# Altium PCB PCB1.PcbDoc
Units mm, origin at the board's own origin, x right, y up, seen from the top; angles counter-clockwise.
Board outline 39.4 x 33.3 mm, 2 copper layers (Top Layer, Bottom Layer); 22 components, 18 nets, 98 pads, 13 vias.
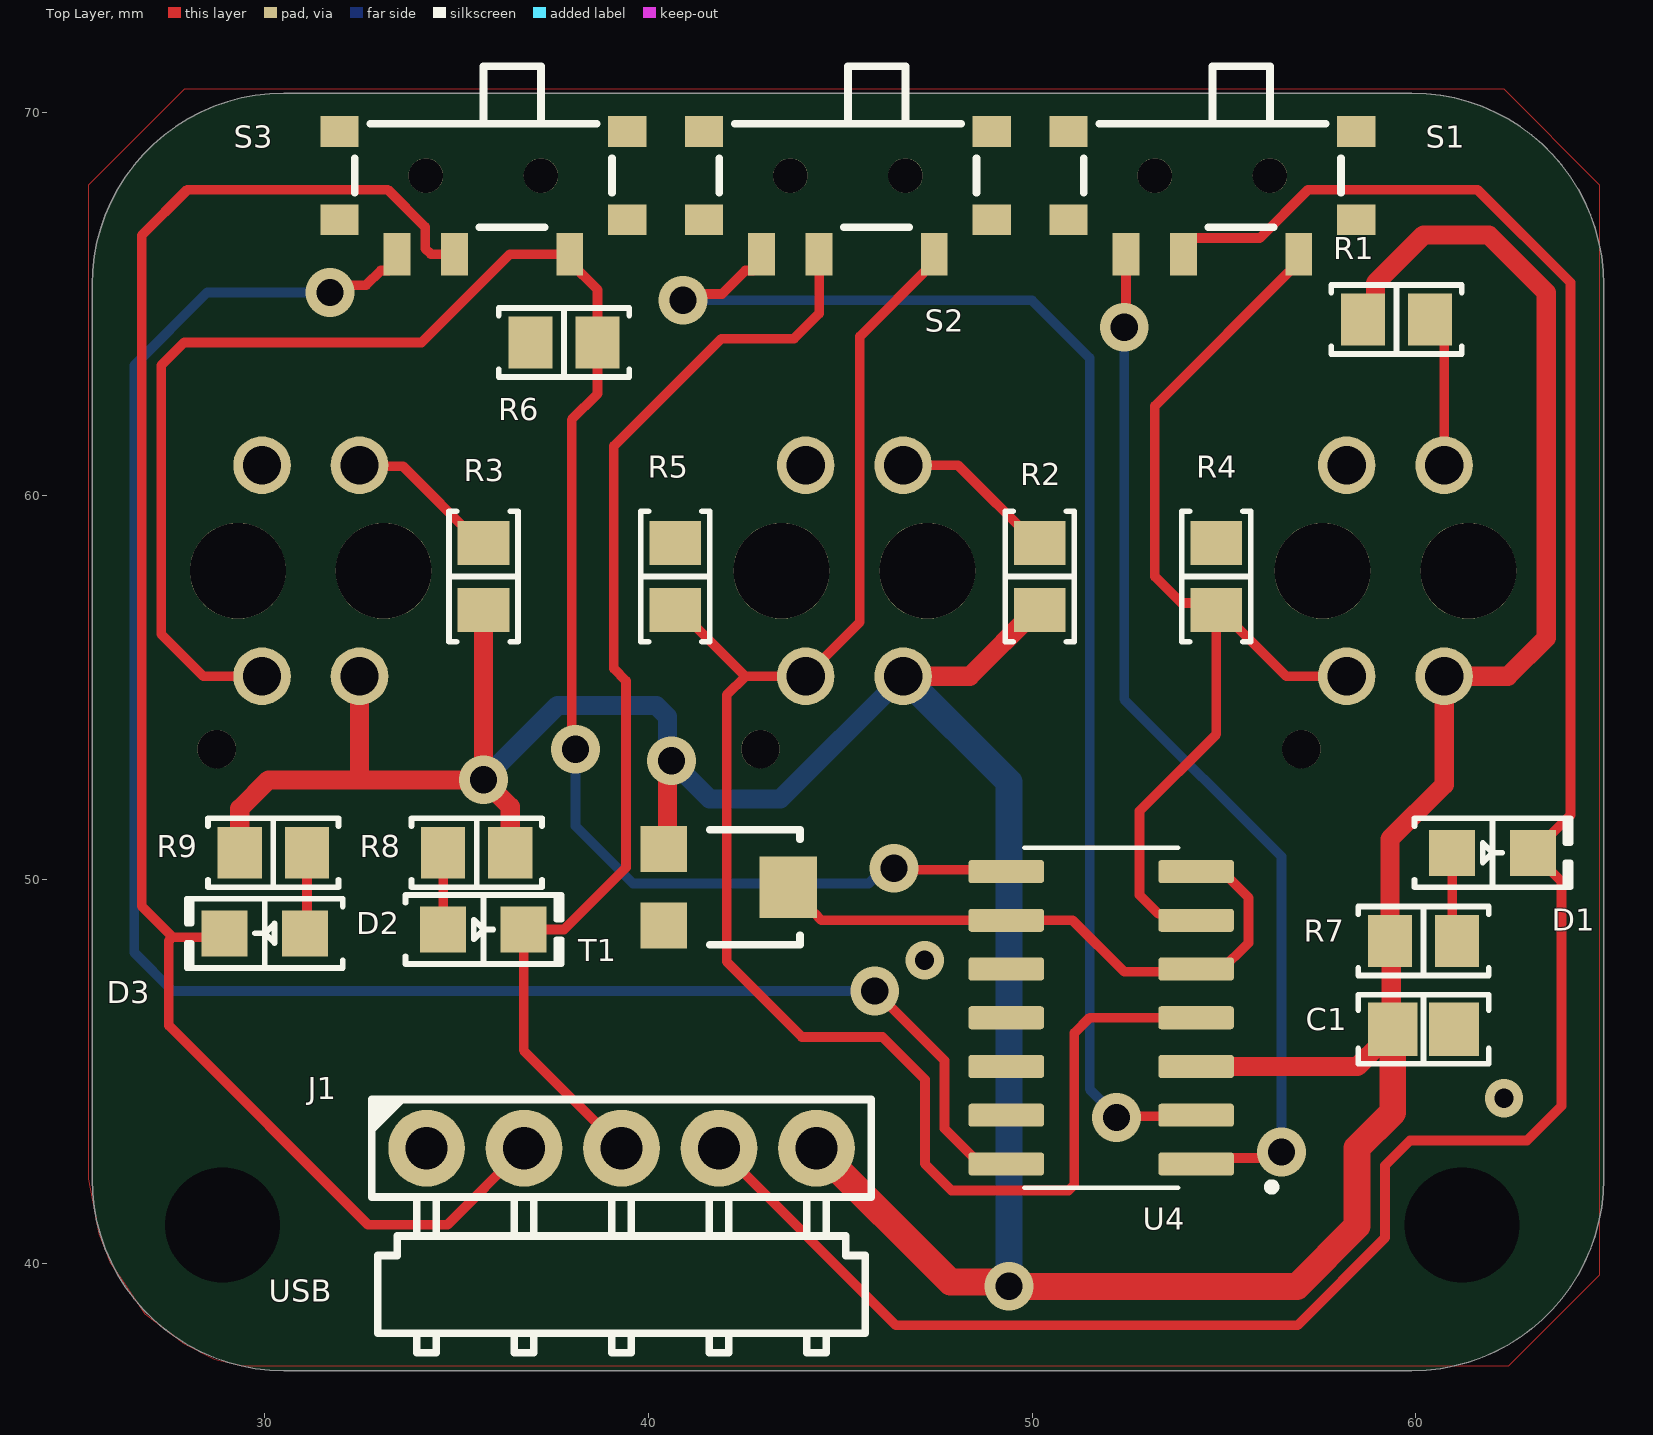
[diagram p0: Top Layer view]
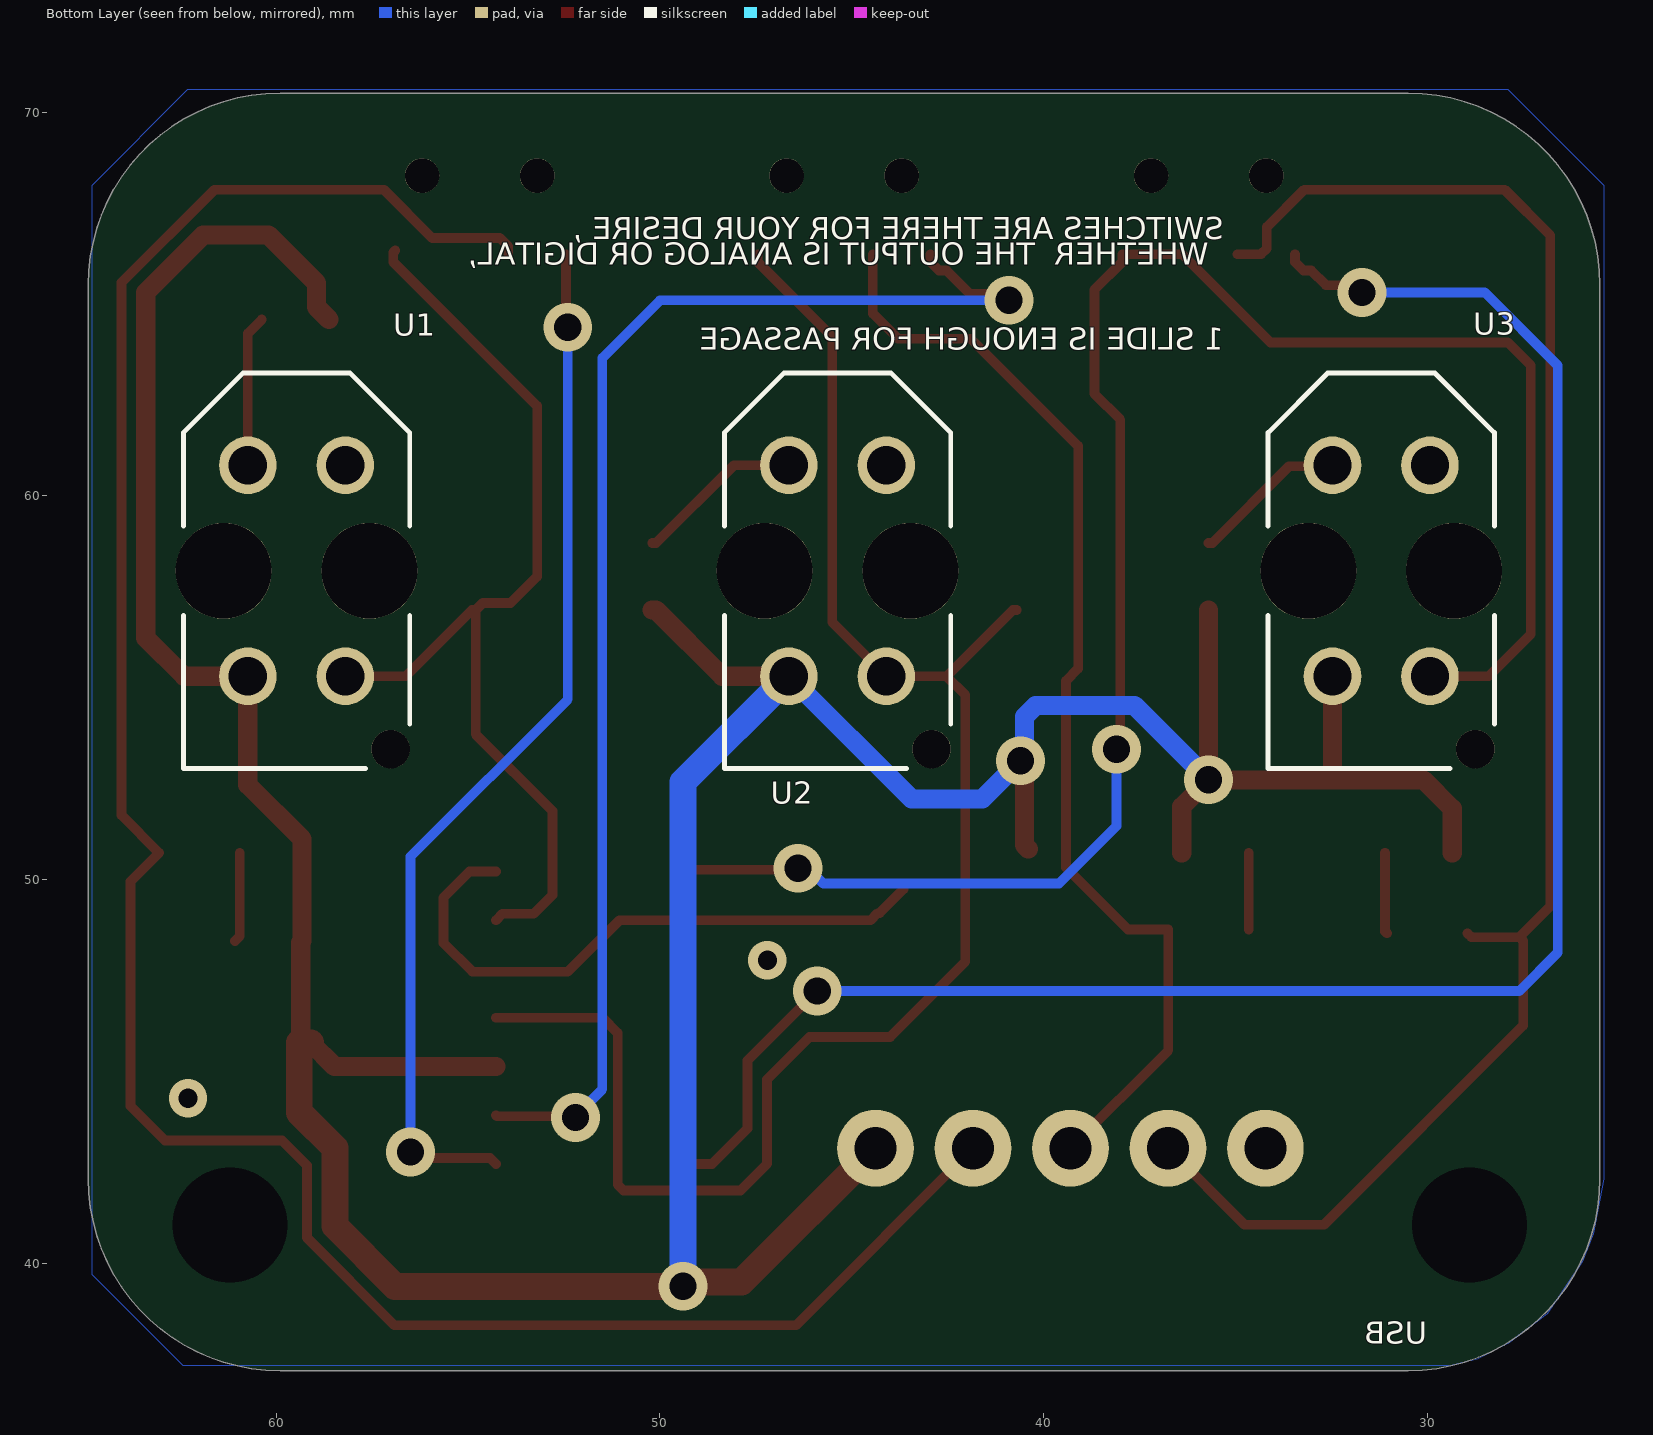
[diagram p1: Bottom Layer view, seen from below]
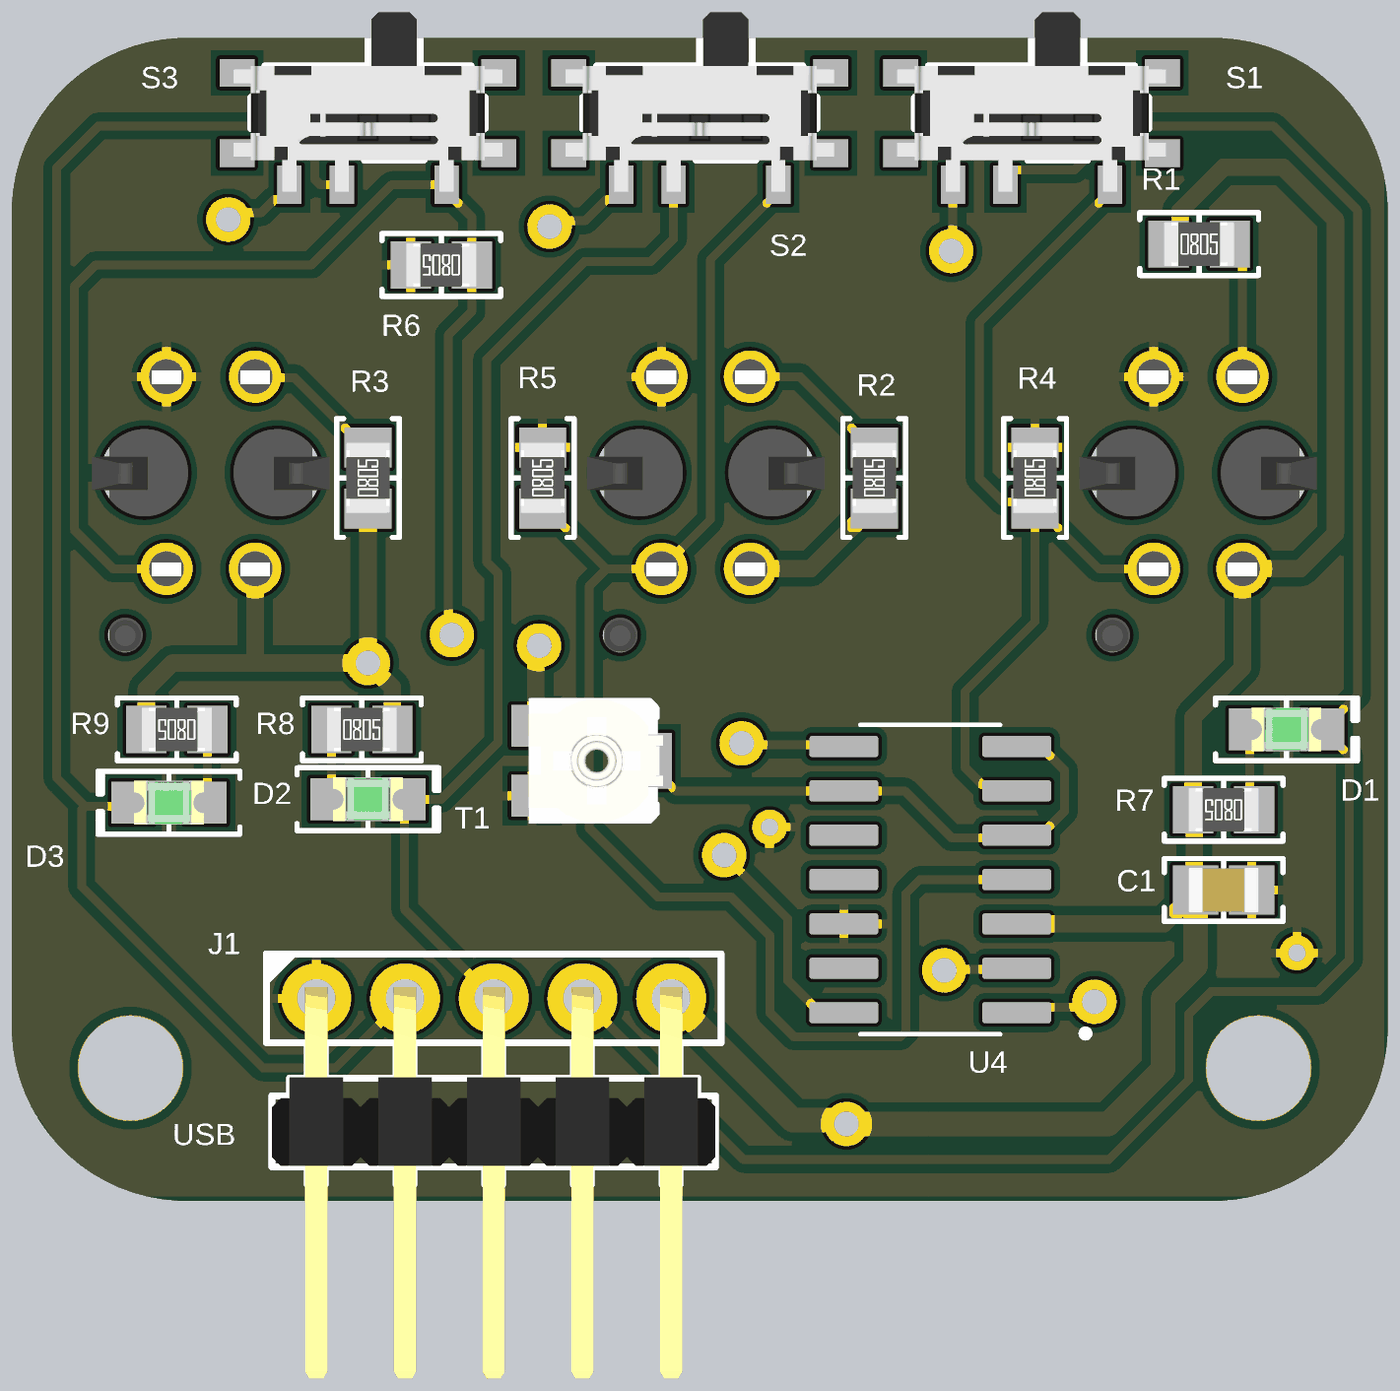
[diagram p2: 3D render of the assembled board from above, using the file's embedded part models]
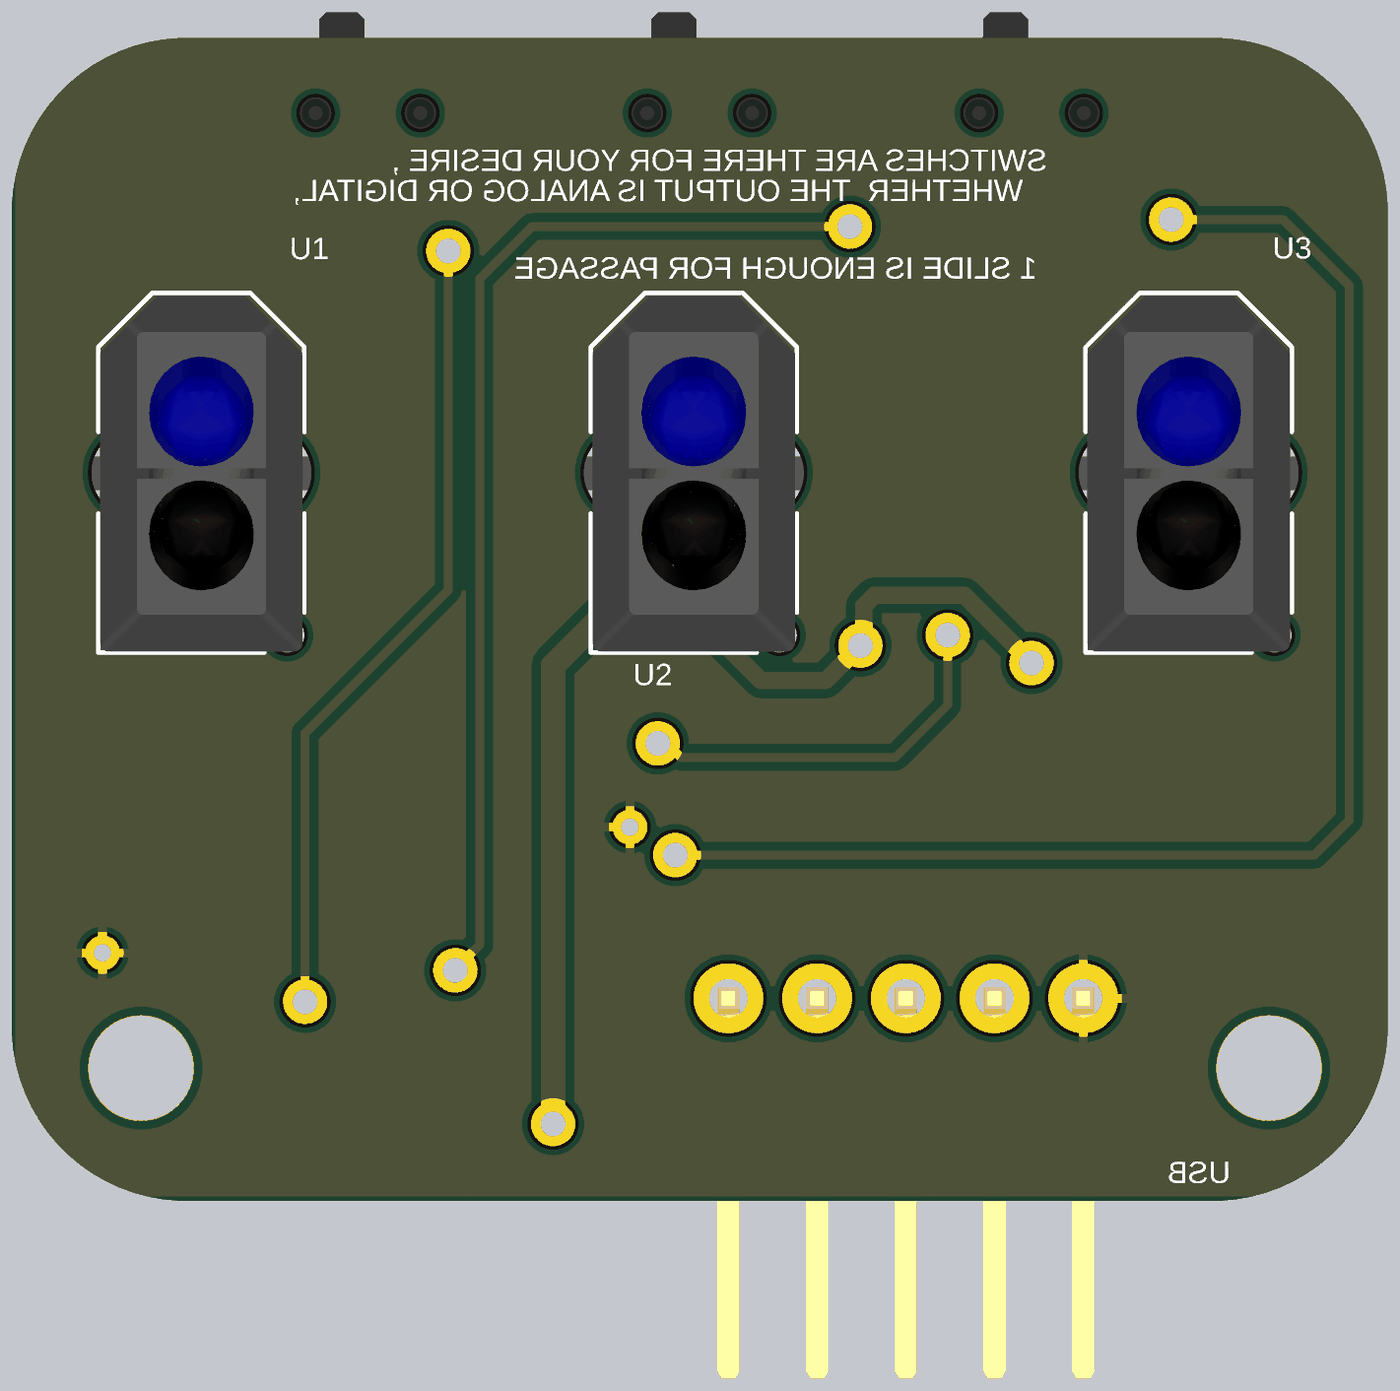
[diagram p3: 3D render of the assembled board from below, using the file's embedded part models]

## Layer stack, top to bottom
Top Solder: solder mask 0.0102, Solder Resist, Dk 3.5
Top Layer: signal copper 0.0356
Dielectric 1: dielectric 0.32, FR-4, Dk 4.8
Bottom Layer: signal copper 0.0356
Bottom Solder: solder mask 0.0102, Solder Resist, Dk 3.5

## Board outline
25.5,42.2 25.5,65.5 cw(c30.5,65.5) 30.5,70.5 59.9,70.5 cw(c59.9,65.5) 64.9,65.5 64.9,42.2 cw(c59.9,42.2) 59.9,37.2 30.5,37.2 cw(c30.5,42.2)

## Design rules (kind name [scope] priority, off if disabled: settings)
Clearance [All] p1: gap=0.254 ignorepadtopadclearanceinfootprint=FALSE except(0: Arc-Hole Track-Hole SMDPad-Hole THPad-Hole Via-Hole Fill-Hole Poly-Hole Region-Hole Text-Hole)
PolygonConnect [All] p1: connectstyle=Relief reliefconductorwidth=0.254 reliefentries=4 polygonreliefangle="90 Angle" airgapwidth=0.254
RoutingVias [All] p1: holewidth=0.6 width=0.6 viastyle="Through Hole" minholewidth=0.3 minwidth=0.3 maxholewidth=0.9 maxwidth=1.5
SolderMaskExpansion [All] p1: expansion=0.102 istentingtop=FALSE
Width [All] p1: maxlimit=1 minlimit=0.152 preferedwidth=0.254
30 further rules are at their usual default settings.

## Components (designator, comment, footprint, x,y, rotation, side; value= is the part's Value field where it differs from the comment)
C1 "0.1 µF" "CAP 0805_2012" 60.2,46.1 r180 top
D1 "Green" "LED 0805_2012 GREEN" 62,50.7 r0 top
D2 "Green" "LED 0805_2012 GREEN" 35.7,48.7 r0 top
D3 "Green" "LED 0805_2012 GREEN" 30,48.6 r180 top
J1 "M20-9960545" "HARWIN M20-9960545" 39.3,43 r0 top
R1 "220Ohms" "RES 0805_2012" 59.5,64.6 r0 top
R2 "220Ohms" "RES 0805_2012" 50.2,57.9 r90 top
R3 "220Ohms" "RES 0805_2012" 35.7,57.9 r90 top
R4 "10kOhms" "RES 0805_2012" 54.8,57.9 r90 top
R5 "10kOhms" "RES 0805_2012" 40.7,57.9 r90 top
R6 "10kOhms" "RES 0805_2012" 37.8,64 r180 top
R7 "220Ohms" "RES 0805_2012" 60.2,48.4 r180 top
R8 "220Ohms" "RES 0805_2012" 35.525,50.7 r0 top
R9 "220Ohms" "RES 0805_2012" 30.225,50.7 r180 top
S1 "450404015514" "WURTH WS-SLSU 450404015514" 54.7,68.35 r0 top
S2 "450404015514" "WURTH WS-SLSU 450404015514" 45.2,68.35 r0 top
S3 "450404015514" "WURTH WS-SLSU 450404015514" 35.7,68.35 r0 top
T1 "5 kOhms" "POT BOURNS TRIMPOT TC33" 42.2,49.8 r270 top
U1 "TCRT5000" OPTO_TCRT5000 59.47,58.05 r90 bottom
U2 "TCRT5000" OPTO_TCRT5000 45.37,58.05 r90 bottom
U3 "TCRT5000" OPTO_TCRT5000 31.2,58.05 r90 bottom
U4 "LM339" SOIC127P600X175-14N 51.8,46.4 r180 top

## Footprints (in the part's own frame and the unit in brackets; to place one, negate y for a bottom-side part, rotate by r counter-clockwise, add the part's x,y. Pads: shape width x height; smd on the part's side, far side on the other; paste and mask are expansions set on the pad)
"CAP 0805_2012" [mm] "Chip Capacitor, 2-Leads, Body 2.00x1.20mm, IPC Medium Density"
  rect 1.3x1.4 smd: 1(-0.8,0) 2(0.8,0)
  silkscreen extent -1.7,-0.9 1.7,0.9, body extent -1,-0.64 1,0.64, height 1.26
"HARWIN M20-9960545" [mm] "2.54mm DIL PC TAIL PIN HEADER ASSEMBLY"
  round 2 hole 1.1: 1(-5.08,0) 2(-2.54,0) 3(0,0) 4(2.54,0) 5(5.08,0)
  silkscreen extent -6.51,-5.33 6.51,1.3, body extent -6.35,-10.9 6.35,0.32, height 2.54
"LED 0805_2012 GREEN" [mm] "Chip Diode, 2-Leads, Body 2.00x1.25mm, IPC Medium Density"
  rect 1.2x1.2 smd: 1(-1.05,0) 2(1.05,0)
  silkscreen extent -2.03,-0.9 2.03,0.9, body extent -1,-0.62 1,0.63, height 0.9
OPTO_TCRT5000 [mm]
  round 1.5 hole 1: A(2.75,1.27) CATH(2.75,-1.27) COLL(-2.75,1.27) E(-2.75,-1.27)
  round 1 hole 1 unplated: ""(-4.65,-2.45)
  round 2.5 hole 2.5 unplated: ""(0,-1.9) ""(0,1.9)
  silkscreen extent -5.15,-2.95 5.15,2.95, body extent -5.12,-3.4 5.08,3.4, height 7.58
"POT BOURNS TRIMPOT TC33" [mm] "Bourns Trimpot TC33X-1 - Open Frame 3mm x 3.8mm x 1.2mm"
  rect 1.2x1.2 smd: 1(-1,-1.8) 3(1,-1.8)
  rect 1.6x1.5 smd: 2(0,1.45)
  silkscreen extent -1.5,-0.6 1.5,1.75, body extent -1.8,-1.91 1.8,1.95, height 1.15
"RES 0805_2012" [mm] "Chip Resistor, 2-Leads, Body 2.00x1.25mm, IPC Medium Density"
  rect 1.15x1.35 smd: 1(-0.875,0) 2(0.875,0)
  silkscreen extent -1.7,-0.9 1.7,0.9, body extent -1,-0.62 1,0.63, height 0.6
SOIC127P600X175-14N [mm]
  rrect25% 1.97x0.6 smd: 1(-2.475,3.81) 2(-2.475,2.54) 3(-2.475,1.27) 4(-2.475,0) 5(-2.475,-1.27) 6(-2.475,-2.54) 7(-2.475,-3.81) 8(2.475,-3.81) 9(2.475,-2.54) 10(2.475,-1.27) 11(2.475,0) 12(2.475,1.27) 13(2.475,2.54) 14(2.475,3.81)
  silkscreen extent -4.54,-4.43 2,4.51
"WURTH WS-SLSU 450404015514" [mm] "Right angle Slide Switch"
  rect 0.7x1.1 smd: 1(2.25,-2.05) 2(-0.75,-2.05) 3(-2.25,-2.05)
  rect 1x0.8 smd: M(-3.75,-1.15) M(-3.75,1.15) M(3.75,-1.15) M(3.75,1.15)
  round 0.9 hole 0.9 unplated: MH(-1.5,0) MH(1.5,0)
  silkscreen extent -3.35,-1.35 3.35,2.85, body extent -3.85,-2.25 3.85,2.88, height 1.4

## Part data
C1: library part CC0805JRX7R9BB104, "CAP CER 0.1UF 50V X7R 0805", Device Package="0805 (2012 Metric)", manufacturer=Yageo, Operating Temperature="-55°C ~ 125°C", Supplier Part Number 1=311-1858-1-ND, Temperature Coefficient=X7R, Tolerance=±5%, Voltage - Rated=50V, Applications="General Purpose", Capacitance="0.1 µF", componentlink1description=Datasheet, componentlink1url=https://www.yageo.com/upload/media/product/productsearch/datasheet/mlcc/UPY-GPHC_X7R_6.3V-to-50V_18.pdf, componentlink2description="DigiKey Link", componentlink2url=https://www.digikey.com/en/products/detail/yageo/CC0805JRX7R9BB104/5195265, lastupdated="9/19/2022 1:04:26 PM", Lifecycle Status=Active, Minimum Order=1, Mounting Type="Surface Mount, MLCC", Package / Case="0805 (2012 Metric)", packaging=TapeAndReel, Part Number=CC0805JRX7R9BB104, Part Status=Active, partid=42886, price=0.02, series=CC, Size / Dimension="0.079\" L x 0.049\" W (2.00mm x 1.25mm)", Supplier 1=DigiKey, Thickness (Max)="0.037\" (0.95mm)"
D1 D2 D3: library part XZVG54W-4, "2.0X1.2MM GREEN SMD 0805 LED", Current - Test=20mA, Device Package="0805 (2012 Metric)", Lens Color=Colorless, manufacturer=SunLED, Millicandela Rating=49mcd, Supplier Device Package=0805, Supplier Part Number 1=1497-XZVG54W-4CT-ND, Voltage - Forward (Vf) (Typ)=2.1V, Color=Green, componentlink1description=Datasheet, componentlink1url=https://www.sunledusa.com/products/spec/XZVG54W-4.pdf, componentlink2description="DigiKey Link", componentlink2url=https://www.digikey.com/en/products/detail/sunled/XZVG54W-4/13559316, Height (Max)=0.50mm, lastupdated="9/19/2022 1:50:42 PM", Lens Size="1.30mm x 1.25mm", Lens Style="Rectangle with Flat Top", Lens Transparency=Clear, Lifecycle Status=Active, Minimum Order=1, Mounting Type="Surface Mount", Package / Case="0805 (2012 Metric)", packaging=TapeAndReel, Part Number=XZVG54W-4, Part Status=Active, partid=1024, price=0.05, series=-, Size / Dimension="2.00mm L x 1.25mm W", Supplier 1=DigiKey, Viewing Angle=140°, Wavelength - Dominant=570nm, Wavelength - Peak=574nm
J1: "CONN HEADER R/A 5POS 2.54MM", Current Rating (Amps)="3A per Contact", Insulation Color=Black, manufacturer="Harwin Inc.", Material Flammability Rating="UL94 V-0", Operating Temperature="-40°C ~ 105°C", Supplier Part Number 1=952-2246-ND, componentlink1description=Datasheet, componentlink1url=https://cdn.harwin.com/pdfs/Harwin_PC_Connectors_M20.pdf, componentlink2description="DigiKey Link", componentlink2url=https://www.digikey.com/en/products/detail/harwin-inc/M20-9960545/3728210, Connector Type="Header, Cuttable", Contact Finish - Mating=Gold, Contact Length - Mating="0.240\" (6.10mm)", Contact Length - Post="0.118\" (3.00mm)", Contact Material=Brass, Contact Shape=Square, Contact Type="Male Pin", Fastening Type=Push-Pull, Insulation Height="0.100\" (2.54mm)", Insulation Material="Polyamide (PA6T), Nylon 6T", lastupdated="9/21/2022 7:23:36 PM", Lifecycle Status=Active, Minimum Order=1, Mounting Type="Through Hole, Right Angle", Number of Positions=5, Number of Positions Loaded=All, Number of Rows=1, packaging=Bulk, Part Number=M20-9960545, Part Status=Active, partid=168, Pitch - Mating="0.100\" (2.54mm)", price=0.14, Row Spacing - Mating="-40°C ~ 105°C", series=M20, Shrouding=Unshrouded, Style="Board to Board or Cable", Supplier 1=DigiKey, Termination=Solder
R1 R2 R3 R4 R5 R6 R7 R8 R9: library part ERJ-6ENF3001V, "RES SMD 3K OHM 1% 1/8W 0805", Device Package="0805 (2012 Metric)", manufacturer="Panasonic Electronic Components", Operating Temperature="-55°C ~ 155°C", Power (Watts)="0.125W, 1/8W", Ratings=AEC-Q200, Resistance="3 kOhms", Supplier Device Package=0805, Supplier Part Number 1=P3.0KCCT-ND, Temperature Coefficient=±100ppm/°C, Tolerance=±1%, componentlink1description=Datasheet, componentlink1url=https://industrial.panasonic.com/cdbs/www-data/pdf/RDA0000/AOA0000C304.pdf, componentlink2description="DigiKey Link", componentlink2url=https://www.digikey.com/en/products/detail/panasonic-electronic-components/ERJ-6ENF3001V/366038, Composition="Thick Film", Features="Automotive AEC-Q200", Height - Seated (Max)="0.028\" (0.70mm)", lastupdated="9/19/2022 1:36:50 PM", Lifecycle Status=Active, Minimum Order=1, Number of Terminations=2, Package / Case="0805 (2012 Metric)", packaging=TapeAndReel, Part Number=ERJ-6ENF3001V, Part Status=Active, partid=30109, price=0.01, series=ERJ-6EN, Size / Dimension="0.079\" L x 0.049\" W (2.00mm x 1.25mm)", Supplier 1=DigiKey
S1 S2 S3: "MINI SLIDE SWITCH 6.7 X 2.7 MM.", Current Rating (Amps)="300mA (DC)", manufacturer="Würth Elektronik", Operating Temperature="-40°C ~ 85°C", Rated Current=300mA, Rated Voltage=5VDC, Supplier Part Number 1=732-13665-1-ND, Voltage Rating - DC="5 V", Actuator Length=1.50mm, Actuator Type=Standard, Circuit=SPDT, componentlink1description=Datasheet, componentlink1url=https://katalog.we-online.de/em/datasheet/450404015514.pdf, componentlink2description="DigiKey Link", componentlink2url=https://www.digikey.com/en/products/detail/würth-elektronik/450404015514/9950812, Contact Finish=Silver, Contact Material="Copper Alloy", Contact Plating=Silver, Contact Timing="Non-Shorting (BBM)", lastupdated="6/20/2022 1:21:56 PM", Lifecycle Status=Active, Minimum Order=1, Mounting Technology=SMT, Mounting Type="Surface Mount", packaging=TapeAndReel, Part Number=450404015514, Part Status=Active, partid=5, price=0.48, Published Date="September 2019", Publisher="Wurth Elektronik", series=WS-SLSU, Size=6.7x2.7mm, Supplier 1=DigiKey, Switch Function=On-On, Switching Function=On-On, Terminal Material="Copper Alloy", Terminal Plating=Silver, Termination Style="SMD (SMT) Tab"
T1: library part TC33X-2-502E, "TRIMMER 5K OHM 0.1W J LEAD TOP", manufacturer="Bourns Inc.", Power (Watts)="0.1W, 1/10W", Resistive Material=Cermet, Supplier Part Number 1=TC33X-502ECT-ND, Temperature Coefficient=±250ppm/°C, Tolerance=±25%, Adjustment Type="Top Adjustment", componentlink1description=Datasheet, componentlink1url=https://www.bourns.com/docs/Product-Datasheets/TC33.pdf, componentlink2description="DigiKey Link", componentlink2url=https://www.digikey.com/en/products/detail/bourns-inc/TC33X-2-502E/612861, lastupdated="9/19/2022 1:51:26 PM", Lifecycle Status=Active, Minimum Order=1, Mounting Type="Surface Mount", Number of Turns=1, packaging=TapeAndReel, Part Number=TC33X-2-502E, Part Status=Active, partid=6, price=0.11, Resistance="5 kOhms", series="Trimpot® TC33 - Open Frame", Size / Dimension="Rectangular - 0.150\" x 0.142\" Face (3.80mm x 3.60mm)", Supplier 1=DigiKey, Termination Style="J Lead"
U1 U2 U3: "950 nm 60 mA Through Hole Reflective Optical Sensor with Transistor Output", Package=None, Availability=Unavailable, MP=TCRT5000, price=None
U4: "Comparator Differential CMOS, MOS, Open-Collector, TTL 14-SOIC                                          LM339 is used in applications where a comparison between two voltage signals is required. In addition with four of those comparators on board the device can compare four pairs of voltage signals at a time which comes in handy in some applications.", Package="SOIC-14 Texas Instruments", Availability=Unavailable, MF="Texas Instruments", MP=LM339, price=None, SnapEDA_Link=https://www.snapeda.com/parts/LM339/Texas%20Instruments/view-part/2886154/?ref=snap

## Free pads (board coordinates)
  round 1.8 hole 3: ""(28.9,41) ""(61.2,41)

## Via types
v1: diameter 1.27, hole 0.711, Top Layer to Bottom Layer, 11 vias
v2: diameter 1, hole 0.5, Top Layer to Bottom Layer, 2 vias

## Nets (pads, with @x,y where several pads share a name; then routed paths per layer and width w, separated by ;. In a path a pad name is that pad's centre, name@x,y a point inside that pad or via, vN(x,y) a via of type N, cw(c..) or ccw(c..) an arc to the next point about the centre after c; other vN are vias at no path point)
5V: C1.2 J1.5 R1.1 R2.1 R3.1 R7.2 R8.2 R9.2 T1.1 U1.COLL U2.COLL U3.COLL U4.3 | length 111.3
  Top Layer w0.5: R9.2 29.35,51.85 30.1,52.6 32.5,52.6 ; U3.COLL 32.47,52.63 32.5,52.6 ; R3.1 v1(35.7,52.6) ; R8.2 36.4,51.9 v1(35.7,52.6) ; T1.1 40.5,50.9 40.5,53 v1(40.6,53.1) ; U2.COLL 48.375,55.3 50.1,57.025 R2.1 ; U4.3 58.48,45.13 59.1,45.75 59.363,46.012 59.363,48.362 R7.2 59.325,51.057 60.74,52.472 U1.COLL 62.4,55.3 63.4,56.3 63.4,65.3 61.9,66.8 60.2,66.8 58.95,65.55 58.95,64.925 R1.1 ; 32.5,52.6 v1(35.7,52.6)
  Top Layer w0.7: J1.5 47.871,39.509 49.291,39.509 v1(49.4,39.4) 56.9,39.4 58.469,40.969 58.469,43.003 59.4,43.934 59.4,45.75 C1.2@59.1,45.75
  Bottom Layer w0.5: v1(35.7,52.6) 35.7,52.611 37.628,54.539 40.207,54.539 40.5,54.246 40.5,53.2 v1(40.6,53.1) 41.6,52.1 43.44,52.1 U2.COLL
  Bottom Layer w0.7: U2.COLL 49.4,52.54 v1(49.4,39.4)
GND: C1.1 J1.1 R4.2 R5.2 R6.2 T1.3 U1.CATH U2.CATH U3.CATH U4.12
  other v2: 62.3,44.3 47.2,47.9
NetD1_1: D1.1 R7.1 | length 2.4
  Top Layer w0.254: D1.1 60.95,48.525 R7.1
NetD2_1: D2.1 R8.1 | length 2
  Top Layer w0.254: D2.1 R8.1
NetD3_1: D3.1 R9.1 | length 2.1
  Top Layer w0.254: D3.1 31.1,48.65 R9.1
NetR1_2: R1.2 U1.A | length 4
  Top Layer w0.254: R1.2 60.74,64.235 U1.A
NetR2_2: R2.2 U2.A | length 4.4
  Top Layer w0.254: U2.A 48.075,60.8 50.1,58.775 R2.2
NetR3_2: R3.2 U3.A | length 4.1
  Top Layer w0.254: U3.A 32.496,60.774 33.601,60.774 35.6,58.775 R3.2
NetT1_2: T1.2 U4.5 U4.7 U4.9 | length 16.1
  Top Layer w0.254: T1.2 43.65,49.75 44.273,49.127 44.323,49.127 44.51,48.94 U4.9 51.06,48.94 52.4,47.6 54.89,47.6 55.641,48.351 55.641,49.529 54.96,50.21 U4.7
SENSOR_C: D2.2 J1.3 S2.2 | length 29.5
  Top Layer w0.254: J1.3 36.75,45.55 D2.2 37.8,48.7 39.419,50.319 39.419,55.181 39.1,55.5 39.1,61.3 41.9,64.1 43.8,64.1 44.45,64.75 S2.2
SENSOR_C_ANALOG_OUTPUT: R5.1 S2.1 U2.E U4.4 | length 44.3
  Top Layer w0.254: R5.1 40.8,57.025 42.525,55.3 ; S2.1 47.45,66.1 45.509,64.159 45.509,56.709 U2.E 42.525,55.3 ; U4.4 51.5,46.4 51.1,46 51.1,42.049 50.951,41.9 47.9,41.9 47.208,42.592 47.208,44.792 46.1,45.9 44,45.9 42.039,47.861 42.039,54.814 42.525,55.3
SENSOR_C_DIGITAL_OUTPUT: S2.3 U4.2 | length 36.1
  Top Layer w0.254: v1(40.9,65.1) 41.066,65.266 41.916,65.266 42.527,65.877 42.727,65.877 42.95,66.1 S2.3 ; v1(52.2,43.8) 52.23,43.83 54.245,43.83 U4.2
  Bottom Layer w0.254: v1(40.9,65.1) 50,65.1 51.5,63.6 51.5,44.537 52.2,43.837 v1(52.2,43.8)
SENSOR_L: D1.2 J1.4 S1.2 | length 61.4
  Top Layer w0.254: J1.4 46.456,38.384 56.918,38.384 59.2,40.666 59.2,42.551 59.849,43.2 62.9,43.2 63.8,44.1 63.8,49.95 D1.2 64.031,51.681 64.031,65.561 61.611,67.981 57.192,67.981 55.934,66.723 54.173,66.723 53.95,66.5 S1.2
SENSOR_L_ANALOG_OUTPUT: R4.1 S1.1 U1.E U4.6 | length 26.2
  Top Layer w0.254: U4.6 54.102,49.113 53.287,49.113 52.8,49.6 52.8,51.789 54.8,53.789 R4.1 ; S1.1@56.9,66.4 56.95,66.35 S1.1 56.95,66.1 53.2,62.35 53.2,57.9 53.893,57.207 54.618,57.207 R4.1 ; U1.E 56.625,55.3 54.9,57.025 R4.1
SENSOR_L_DIGITAL_OUTPUT: S1.3 U4.1 | length 27.5
  Top Layer w0.254: v1(52.4,64.4) 52.45,64.45 S1.3 ; U4.1 54.43,42.745 56.345,42.745 v1(56.5,42.9)
  Bottom Layer w0.254: v1(52.4,64.4) 52.4,54.7 56.5,50.6 v1(56.5,42.9)
SENSOR_R: D3.2 J1.2 S3.2 | length 44.3
  Top Layer w0.254: D3.2 28.85,48.5 27.6,48.5 ; S3.2 34.33,66.3 34.181,66.449 34.181,67.008 33.208,67.981 27.981,67.981 26.792,66.792 26.792,49.308 27.6,48.5 ; J1.2 34.765,41.005 32.695,41.005 27.5,46.2 27.5,48.4 27.6,48.5
SENSOR_R_ANALOG_OUTPUT: R6.1 S3.1 U3.E U4.8 | length 49.5
  Top Layer w0.254: U3.E 28.4,55.3 27.3,56.4 27.3,63.4 27.9,64 34.089,64 36.389,66.3 S3.1 37.95,66.1 38.675,65.375 R6.1 38.675,62.662 38,61.987 38,53.5 v1(38.1,53.4) ; v1(46.4,50.3) 46.445,50.255 49.28,50.255 U4.8
  Bottom Layer w0.254: v1(38.1,53.4) 38.1,51.4 39.6,49.9 45.743,49.9 46.143,50.3 v1(46.4,50.3)
SENSOR_R_DIGITAL_OUTPUT: S3.3 U4.14 | length 49.5
  Top Layer w0.254: v1(31.7,65.3) 31.894,65.494 32.644,65.494 33.027,65.877 33.227,65.877 33.45,66.1 S3.3 ; v1(45.9,47.1) 47.716,45.284 47.716,43.514 48.64,42.59 U4.14
  Bottom Layer w0.254: v1(31.7,65.3) 28.5,65.3 26.6,63.4 26.6,48.1 27.6,47.1 v1(45.9,47.1)
pads on no net: S1.M S1.MH S2.M S2.MH S3.M S3.MH U1. U2. U3. U4.10 U4.11 U4.13

## Polygon pours and split planes (outlines as drawn)
GND on Bottom Layer "NONET_L02_P001" (solid, shelved, pour order 1): 26.878,38.685 27.9,37.9 28.7,37.5 29.4,37.324 62.425,37.324 62.425,37.325 64.8,39.7 64.8,68.1 62.3,70.6 27.9,70.6 25.4,68.1 25.4,42.2 25.679,40.769 25.957,40.039
GND on Top Layer "NONET_L01_P003" (solid, shelved, pour order 3): 26.878,38.685 27.9,37.9 28.7,37.5 29.4,37.324 62.425,37.324 62.425,37.325 64.8,39.7 64.8,68.1 62.3,70.6 27.9,70.6 25.4,68.1 25.4,42.2 25.679,40.769 25.957,40.039

## Silkscreen, mask and mechanical layers (free items; w line width, h text height)
Top Overlay:
  text "USB" at 30.1,38.8 h1
Bottom Overlay:
  text "SWITCHES ARE THERE FOR YOUR DESIRE ," at 35.3,66.5 h1
  text "WHETHER  THE OUTPUT IS ANALOG OR DIGITAL," at 35.7,65.827 h1
  text "1 SLIDE IS ENOUGH FOR PASSAGE" at 35.3,63.611 h1
  text "USB" at 30,37.711 h1
Top Assembly:
  lines w0.076: 25.5,42.2 ccw(c30.5,42.2) 30.5,37.2 59.9,37.2 ccw(c59.9,42.2) 64.9,42.2 64.9,65.5 ccw(c59.9,65.5) 59.9,70.5 30.5,70.5 ccw(c30.5,65.5) 25.5,65.5 25.5,42.2
  lines w0.1: 64.9,66.1 ccw(c64.9,66.1) 64.9,66.1